# Altium PCB E1706D_Demo_2.PcbDoc
Units mil, origin at the board's own origin, x right, y up, seen from the top; angles counter-clockwise.
Board outline 3710 x 4675 mil, 2 copper layers (Top Layer, Bottom Layer); 45 components, 39 nets, 148 pads, 21 vias.
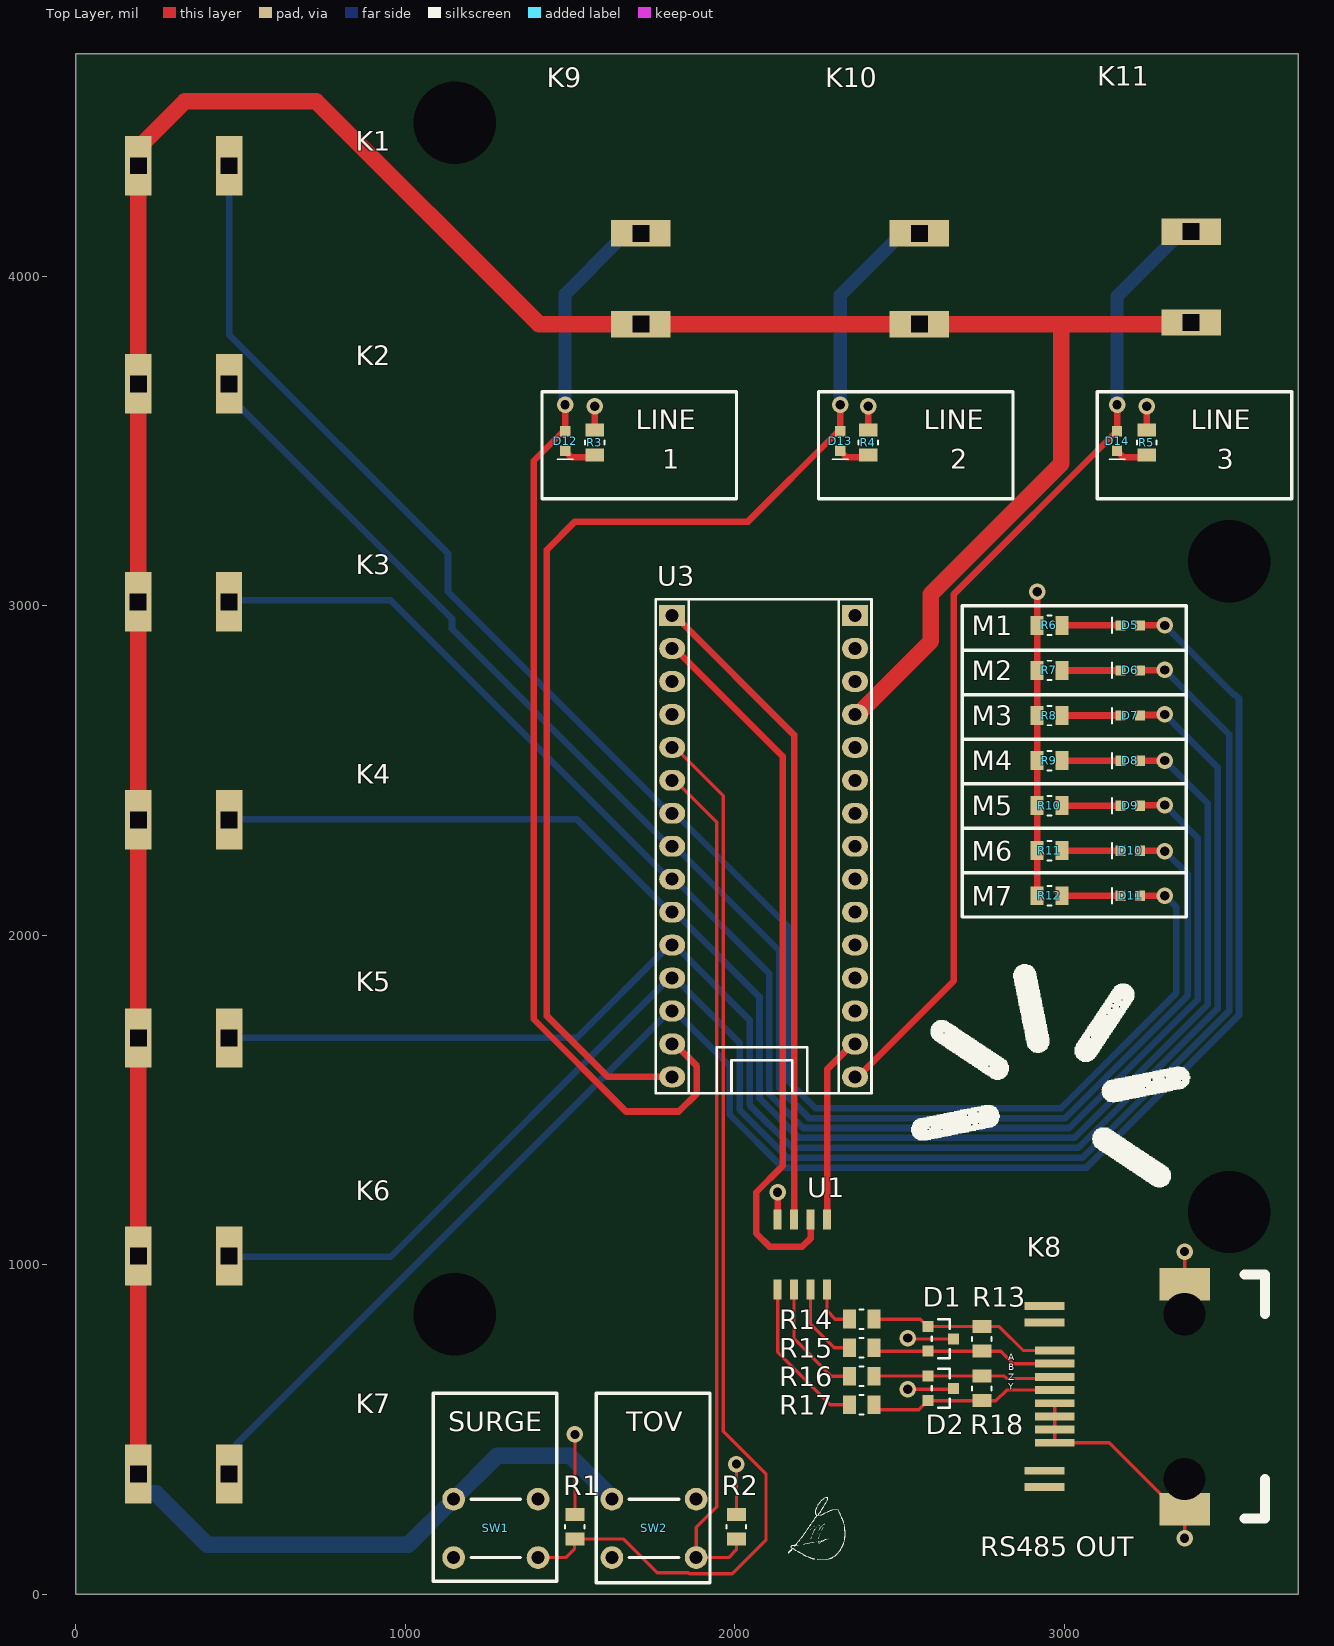
[diagram p0: Top Layer view]
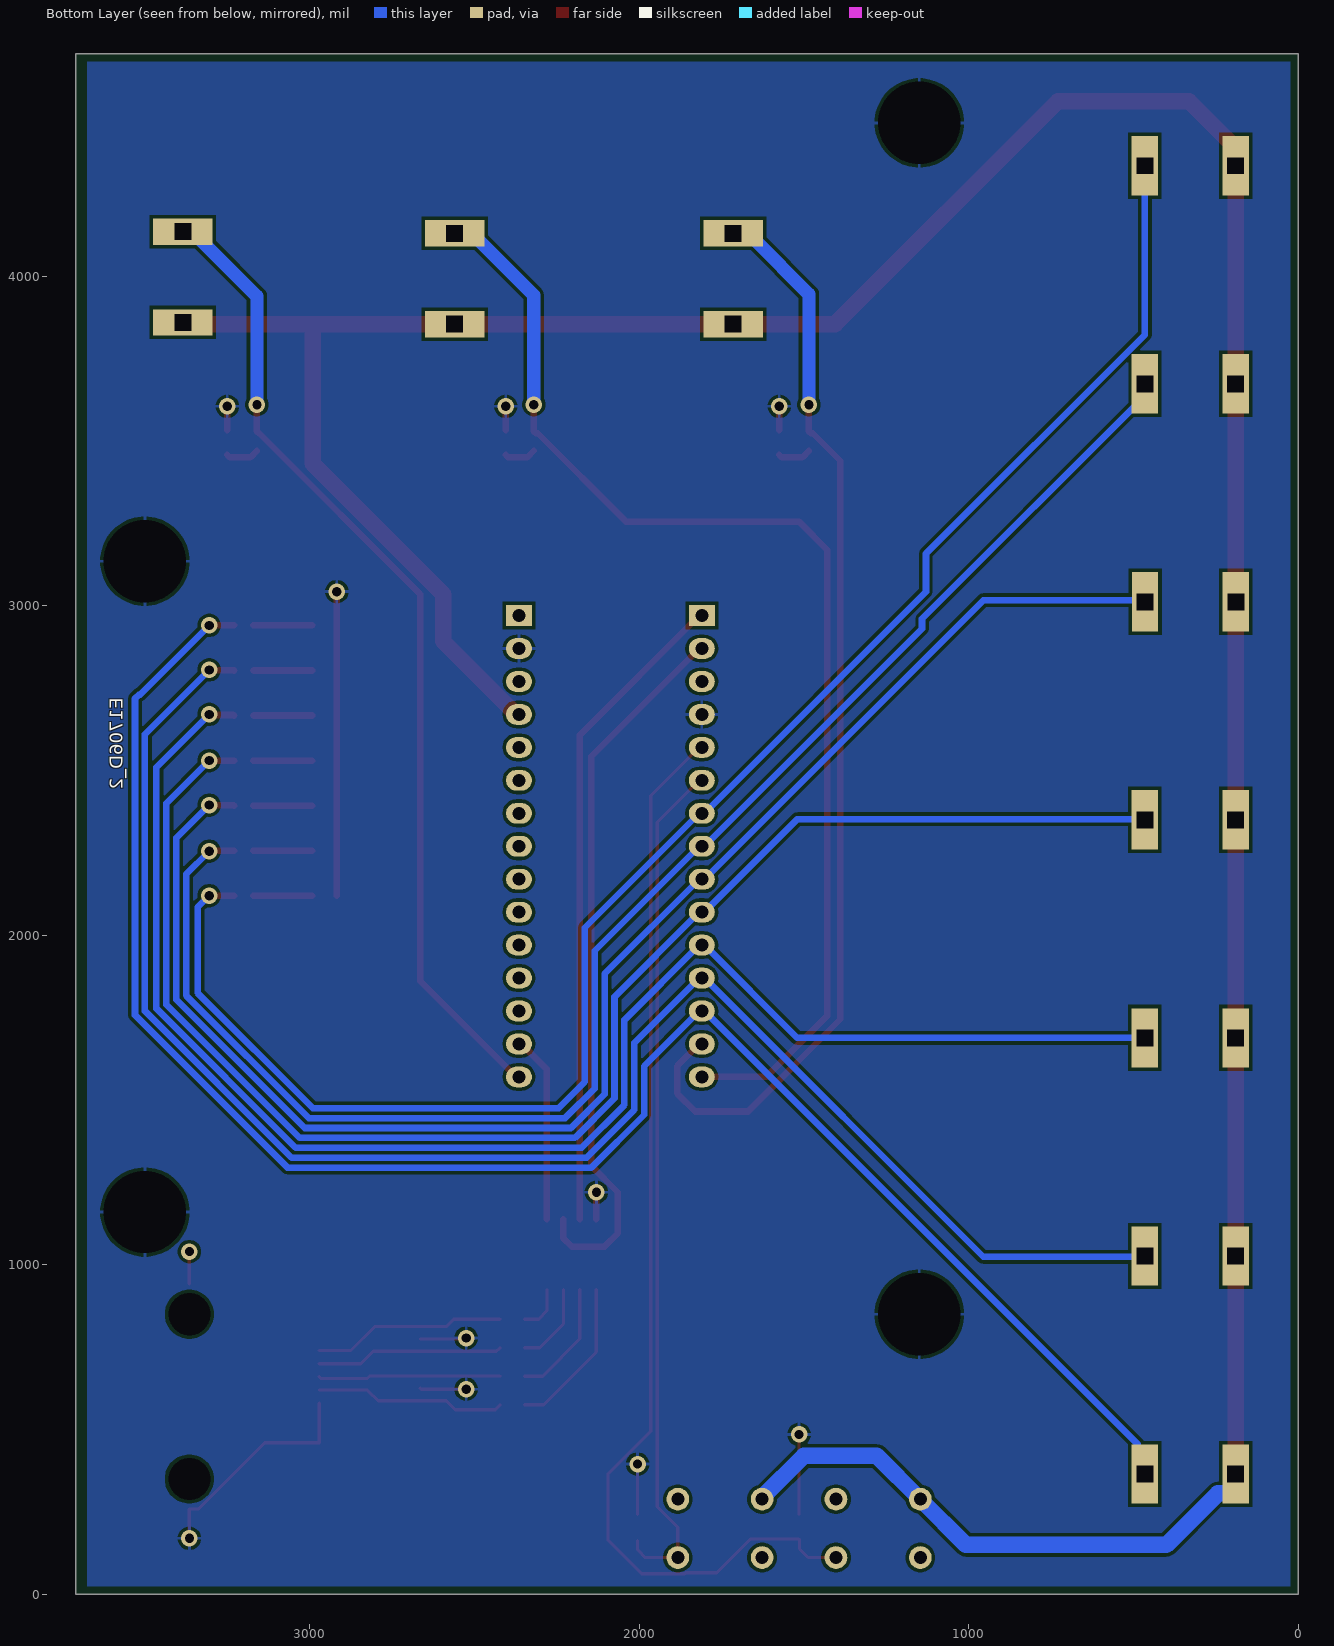
[diagram p1: Bottom Layer view, seen from below]
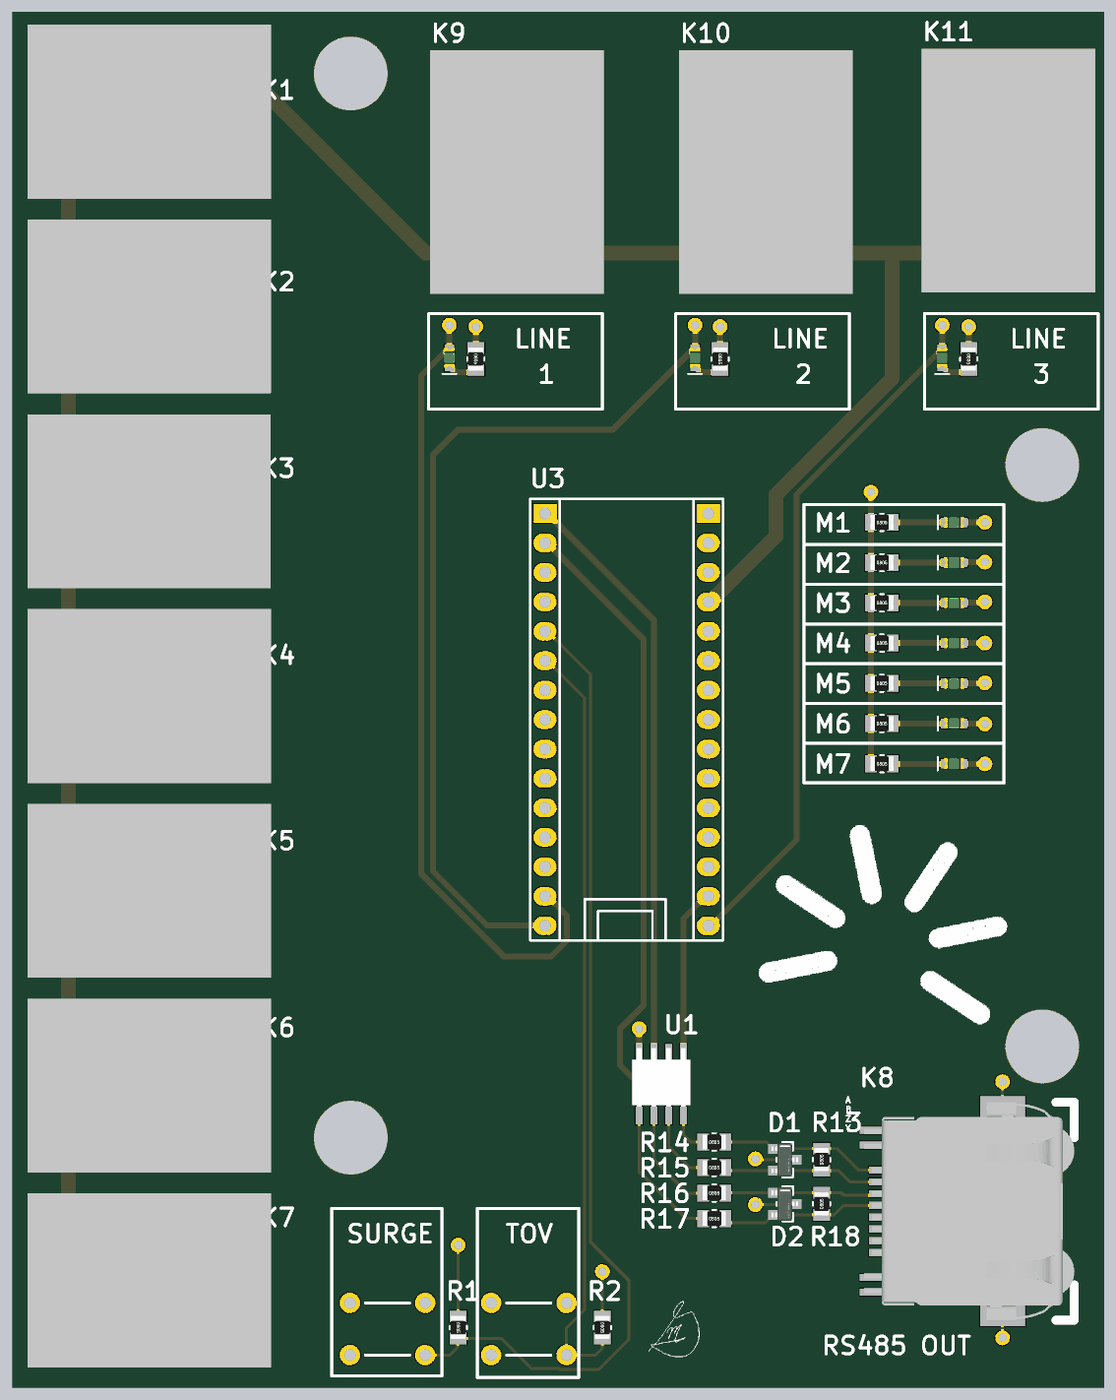
[diagram p2: 3D render of the assembled board from above, using the file's embedded part models]

## Layer stack, top to bottom
Top Solder: solder mask 0.4, Solder Resist, Dk 3.5
Top Layer: signal copper 1.4
Dielectric 1: dielectric 12.6, FR-4, Dk 4.8
Bottom Layer: signal copper 1.4
Bottom Solder: solder mask 0.4, Solder Resist, Dk 3.5

## Board outline
0,0 3710,0 3710,4675 0,4675

## Design rules (kind name [scope] priority, off if disabled: settings)
Clearance [All] p1: gap=10 ignorepadtopadclearanceinfootprint=FALSE except(0: Arc-Hole Track-Hole SMDPad-Hole THPad-Hole Via-Hole Fill-Hole Poly-Hole Region-Hole Text-Hole)
PolygonConnect [All] p1: connectstyle=Relief reliefconductorwidth=10 reliefentries=4 polygonreliefangle="90 Angle" airgapwidth=10
RoomDefinition E1706R_Schematic_1 [InComponentClass('E1706R_Schematic_1')] p1: confinementstyle=ConfineIn formatcopy=TRUE lockcomponents=FALSE outline 3755,1055 6760,1055 6760,3165 3755,3165
RoomDefinition E1706D_Schematic [InComponentClass('E1706D_Schematic')] p2: confinementstyle=ConfineIn formatcopy=TRUE lockcomponents=FALSE outline 6910,910 21770,910 21770,2610 6910,2610
RoutingVias [All] p1: holewidth=28 width=50 viastyle="Through Hole" minholewidth=28 minwidth=50 maxholewidth=28 maxwidth=50
SolderMaskExpansion [All] p1: expansion=4 istentingtop=FALSE
Width [All] p1: maxlimit=100 minlimit=10 preferedwidth=10
30 further rules are at their usual default settings.

## Components (designator, comment, footprint, x,y, rotation, side; value= is the part's Value field where it differs from the comment)
D1 "CDSOT23-SM712" FP-SOT23-MFG 2625,775 r0 top value=75pF
D2 "CDSOT23-SM712" FP-SOT23-MFG 2625,625 r0 top value=75pF
D5 "LED_RED_0603" LED_LTST-C190KRKT 3200,2940 r0 top
D6 "LED_RED_0603" LED_LTST-C190KRKT 3200,2803.33 r0 top
D7 "LED_RED_0603" LED_LTST-C190KRKT 3200,2666.67 r0 top
D8 "LED_RED_0603" LED_LTST-C190KRKT 3200,2530 r0 top
D9 "LED_RED_0603" LED_LTST-C190KRKT 3200,2393.33 r0 top
D10 "LED_RED_0603" LED_LTST-C190KRKT 3200,2256.67 r0 top
D11 "LED_RED_0603" LED_LTST-C190KRKT 3200,2120 r0 top
D12 "LED_RED_0603" LED_LTST-C190KRKT 1485,3499.4 r90 top
D13 "LED_RED_0603" LED_LTST-C190KRKT 2320,3499.4 r90 top
D14 "LED_RED_0603" LED_LTST-C190KRKT 3160,3499.4 r90 top
K1 "RA11131100" RA11131100 190,4335 r0 top
K2 "RA11131100" RA11131100 190,3673.33 r0 top
K3 "RA11131100" RA11131100 189.41,3011.67 r0 top
K4 "RA11131100" RA11131100 190,2350 r0 top
K5 "RA11131100" RA11131100 190,1688.33 r0 top
K6 "RA11131100" RA11131100 190,1026.67 r0 top
K7 "RA11131100" RA11131100 190,365 r0 top
K8 "6339191-5" 6339191-5 2971.3,459.84 r90 top
K9 "RA11131100" RA11131100 1715,3854.41 r90 top
K10 "RA11131100" RA11131100 2560,3854.41 r90 top
K11 "RA11131100" RA11131100 3385,3859.41 r90 top
R1 "10K" RESC2012N 1515,205 r270 top
R2 "10K" RESC2012N 2005,205 r270 top
R3 "150" RESC2012N 1575,3495 r270 top
R4 "150" RESC2012N 2405,3495 r270 top
R5 "150" RESC2012N 3250,3495 r270 top
R6 "150" RESC2012N 2955,2940 r0 top
R7 "150" RESC2012N 2955,2803.33 r0 top
R8 "150" RESC2012N 2955,2666.67 r0 top
R9 "150" RESC2012N 2955,2530 r0 top
R10 "150" RESC2012N 2955,2393.33 r0 top
R11 "150" RESC2012N 2955,2256.67 r0 top
R12 "150" RESC2012N 2955,2120 r0 top
R13 "Res_120_0805" RESC2012N 2750,775 r90 top
R14 "Res_10_0805" RESC2012N 2385,835 r0 top
R15 "Res_10_0805" RESC2012N 2385,748.33 r0 top
R16 "Res_10_0805" RESC2012N 2385,661.67 r0 top
R17 "Res_10_0805" RESC2012N 2385,575 r0 top
R18 "Res_120_0805" RESC2012N 2750,625 r90 top
SW1 "PTS645SL50-2 LFS" "PTS645SL50-2 LFS" 1275,200 r0 top
SW2 "PTS645SL50-2 LFS" "PTS645SL50-2 LFS" 1755,200 r0 top
U1 "SN65HVD71DR" SN65HVD71DR 2280,1137.6 r180 top
U3 "Arduino Nano" "Arduino Nano" 2080,2230 r90 top

## Footprints (in the part's own frame and the unit in brackets; to place one, negate y for a bottom-side part, rotate by r counter-clockwise, add the part's x,y. Pads: shape width x height; smd on the part's side, far side on the other; paste and mask are expansions set on the pad)
6339191-5 [mm]
  rect 2.5x3.9 smd: 0(-5.11,-10) 0(12.23,-10)
  rect 0.61x3.05 smd: 0(-3.425,0.8) 0(-2.155,0.8) 0(9.275,0.8) 0(10.545,0.8) 1(0,0) 2(1.016,0) 3(2.032,0) 4(3.048,0) 5(4.064,0) 6(5.08,0) 7(6.096,0) 8(7.112,0)
  round 1.524 hole 3.25: 0(-2.79,-10) 0(9.91,-10)
  silkscreen extent -5.84,-16.2 12.96,-14.6, body extent -5.84,-16.2 12.96,1.97, height 14.92
"Arduino Nano" [mm]
  rect 1.6x2 hole 1: 1(18.796,6.858) 30(18.796,-7.239)
  oval 1.6x2 hole 1: 2(16.256,6.858) 3(13.716,6.858) 4(11.176,6.858) 5(8.636,6.858) 6(6.096,6.858) 7(3.556,6.858) 8(1.016,6.858) 9(-1.524,6.858) 10(-4.064,6.858) 11(-6.604,6.858) 12(-9.144,6.858) 13(-11.684,6.858) 14(-14.224,6.858) 15(-16.764,6.858) 16(-16.764,-7.239) 17(-14.224,-7.239) 18(-11.684,-7.239) 19(-9.144,-7.239) 20(-6.604,-7.239) 21(-4.064,-7.239) 22(-1.524,-7.239) 23(1.016,-7.239) 24(3.556,-7.239) 25(6.096,-7.239) 26(8.636,-7.239) 27(11.176,-7.239) 28(13.716,-7.239) 29(16.256,-7.239)
  silkscreen extent -18.03,-8.51 20.07,8.13
FP-SOT23-MFG [mm]
  rect 0.85x0.85 smd paste+0 mask+0: 1(-1,0.95) 2(-1,-0.95) 3(1,0)
  silkscreen extent -0.7,-1.5 0.7,1.5, body extent -1.53,-1.6 1.53,1.6, height 0.25
LED_LTST-C190KRKT [mm] "Chip LED, Red, Body 1.6x0.8mm, IPC Medium Density"
  rect 0.8x0.8 smd: 1(-0.75,0) 2(0.75,0)
  silkscreen extent -1.4,-0.6 -1.4,0.6, body extent -0.85,-0.45 0.85,0.45, height 0.9
"PTS645SL50-2 LFS" [mm]
  round 1.75 hole 1: 1(-3.25,2.25) 2(3.25,2.25) 3(-3.25,-2.25) 4(3.25,-2.25)
  silkscreen extent -1.91,-2.25 1.91,2.25, body extent -3.25,-2.92 3.25,2.92, height 3.45
RA11131100 [mil] "Rocker Switch"
  rect 80x180 hole 50 square: 1(0,0) 2(275.59,0)
  body extent -138,-295 689,295, height 484
RESC2012N [mm] "Chip Resistor, Body 2.0x1.3mm, IPC Med Density"
  rect 1x1.45 smd: 1(-0.95,0) 2(0.95,0)
  silkscreen extent -0.15,-0.75 0.15,0.75, body extent -1,-0.63 1,0.63, height 0.59
SN65HVD71DR [mm] "SOIC-8"
  rect 0.6x1.55 smd: 1(0,0) 2(1.27,0) 3(2.54,0) 4(3.81,0) 5(3.81,5.4) 6(2.54,5.4) 7(1.27,5.4) 8(0,5.4)
  body extent -0.6,-0.41 4.4,5.59, height 1.75

## Part data
D1 D2: library part CMP-2000-05081-2, "TVS DIODE 7V/12V 14V/26V SOT23-3", Breakdown Voltage=7.5V, Capacitance=75pF, Case/Package=SOT-23, Clamping Voltage=26V, Leakage Current=20uA, Manufacturer="Bourns Inc.", Max Breakdown Voltage=13.3V, Max Operating Temperature=150°C, Max Power Dissipation=600W, Max Surge Current=30A, Min Operating Temperature=-55°C, Package=SOT23, Package Quantity=1, Peak Pulse Current=17A, Peak Pulse Power=400W, Power Line Protection=No, Resistor Type=Zener, Reverse Standoff Voltage=12V, Supplier Part Number 1=CDSOT23-SM712CT-ND, Temperature="-55°C to +150°C", Temperature Range High=+150°C, Test Current=1mA, Automotive=No, Category=Diode, ComponentLink1Description=https://datasheet.ciiva.com/1281/1670933-1281331.pdf?src-supplier=Farnell, ComponentLink1URL=https://datasheet.ciiva.com/1281/1670933-1281331.pdf?src-supplier=Farnell, ComponentLink2Description=Datasheet, ComponentLink2URL=https://www.bourns.com/docs/Product-Datasheets/CDSOT23-SM712.pdf, ComponentLink3Description=https://datasheet.ciiva.com/4510/cdsot23-sm712-25932-4510261.pdf?src-supplier=Mouser, ComponentLink3URL=https://datasheet.ciiva.com/4510/cdsot23-sm712-25932-4510261.pdf?src-supplier=Mouser, ComponentLink4Description=https://datasheet.ciiva.com/11193/cdsot23-sm712-11193846.pdf?src-supplier=Avnet, ComponentLink4URL=https://datasheet.ciiva.com/11193/cdsot23-sm712-11193846.pdf?src-supplier=Avnet, ComponentLink5Description=https://datasheet.ciiva.com/16582/cdsot23-sm712-16582189.pdf?src-supplier=Avnet+Europe, ComponentLink5URL=https://datasheet.ciiva.com/16582/cdsot23-sm712-16582189.pdf?src-supplier=Avnet+Europe, ComponentLink6Description=https://datasheet.ciiva.com/337/cdsot23-sm712-337451.pdf?src-supplier=Digi-Key, ComponentLink6URL=https://datasheet.ciiva.com/337/cdsot23-sm712-337451.pdf?src-supplier=Digi-Key, ComponentLink7Description=https://datasheet.ciiva.com/337/cdsot23-sm712-337452.pdf?src-supplier=Digi-Key, ComponentLink7URL=https://datasheet.ciiva.com/337/cdsot23-sm712-337452.pdf?src-supplier=Digi-Key, ComponentLink8Description=https://datasheet.ciiva.com/26828/getdatasheetpartid-418501-26828522.pdf?src-supplier=Verical, ComponentLink8URL=https://datasheet.ciiva.com/26828/getdatasheetpartid-418501-26828522.pdf?src-supplier=Verical, ComponentLink9Description=https://datasheet.ciiva.com/22696/1670933-22696779.pdf?src-supplier=Element14, ComponentLink9URL=https://datasheet.ciiva.com/22696/1670933-22696779.pdf?src-supplier=Element14, Contact Plating=Tin, Depth=1.4mm, Device Class L1="Circuit Protection", Device Class L2="TVS Diodes", Device Class L3=unset, Digikey Description="TVS DIODE 7V/12V 14V/26V SOT23-3", Diode Type=ZENER, Direction=Bidirectional, Element Configuration=Dual, ESD Protection=Yes, Height=1.17mm, Ipc Land Pattern Name=SOT95P229X103-3, Lead Free=Yes, Length=3.04mm, Manufacturer Part Number=CDSOT23-SM712, Max Reverse Leakage Current=20uA, Min Breakdown Voltage=13.3V, Mount="Surface Mount", Mouser Description="Transient Voltage Suppressor, TVS, CDSOT23 Series, Unidirectional, 12 V, SOT-23, 3, 13.3 V", Number of Bidirectional Channels=2, Number of Channels=2, Number of Elements=2, Number of Pins=3, Octopart=https://octopart.com/cdsot23-sm712-bourns-7576327, Packaging="Tape and Reel", Polarity=Bidirectional,Unidirectional, Power Dissipation=400W, Pricing 1="1=1.63000, 10=1.46000, 100=1.13850, 500=0.94050, 1000=0.74250 (USD)", Radiation Hardening=No, REACH SVHC="No SVHC", Reverse Breakdown Voltage=13.3V, RoHS=TRUE, RoHS Compliant=Yes, Series=-, Standoff Height=0.05mm, Stock 1=37537, Supplier 1=Digi-Key, Temperature Range Low=-55°C, Termination=SMD/SMT, Width=0.055inch, Working Voltage=12V
D5 D6 D7 D8 D9 D10 D11 D12 D13 D14: library part LED_RED_LTST-C190, "LED RED 0603 SMD", Case Code (Imperial)=0603, Case Code (Metric)=1608, Forward Current=30mA, Forward Voltage=2.4V, Illumination Color=Red, Lens Color=Clear,Colorless, Manufacturer="Vishay Lite-On", Manufacturer P/N=LTST-C190KRKT, Max Operating Temperature=85°C, Min Operating Temperature=-55°C, Package Quantity=1, Power Dissipation=75mW, Reverse Voltage=5V, Supplier Part Number 1=160-1436-1-ND, Test Current=20mA, Case/Package=0603, ComponentLink3Description=http://optoelectronics.liteon.com/upload/download/DS-22-99-0151/LTST-C190KRKT.pdf, ComponentLink3URL=http://optoelectronics.liteon.com/upload/download/DS-22-99-0151/LTST-C190KRKT.pdf, Depth=0.8mm, Dominant Wavelength=631nm, Height=0.8mm, Lead Free="Lead Free", Length=1.6mm, Lens Style=Clear,Colorless,Diffused,Rectangular, Lens Transparency=Clear, Luminous Intensity=54mcd, Mount="Surface Mount", Number of Elements=1, Number of LEDs=1, Number of Pins=2, Power Rating=75mW, Radiation Hardening=No, Supplier 1=Digi-Key, Viewing Angle=130°, Wavelength=639nm, Width=0.8mm
R1 R2: library part Res_10K_0805, "RES 10K OHM 1/8W 1% 0805", Case Code (Imperial)=0805, Case Code (Metric)=2012, Manufacturer=Vishay, Manufacturer P/N=CRCW080510K0FKEA, Max Operating Temperature=155°C, Min Operating Temperature=-55°C, Package Quantity=5000, Power Rating=125mW, Resistance=10kR, Supplier Part Number 1=541-10.0KCCT-ND, Temperature Coefficient=100ppm/°C, Tolerance=1%, Voltage Rating=150V, Case/Package=0805, ComponentLink4Description=http://www.vishay.com/docs/20035/dcrcwe3.pdf, ComponentLink4URL=http://www.vishay.com/docs/20035/dcrcwe3.pdf, Composition="Thick Film", Contact Plating=Tin, Depth=1.25mm, Height=0.45mm, Lead Free="Lead Free", Length=2mm, Military Standard=Not, Radiation Hardening=No, REACH SVHC=Unknown, Supplier 1=Digi-Key, Termination=SMD/SMT, Voltage Rating (DC)=150V, Weight=0.000194oz, Width=1.25mm
R3 R4 R5 R6 R7 R8 R9 R10 R11 R12: library part Res_150_0805, "RES 150 OHM 1/8W 1% 0805", Case Code (Imperial)=0805, Case Code (Metric)=2012, Manufacturer=Vishay, Manufacturer P/N=CRCW0805150RFKEA, Max Operating Temperature=155°C, Max Power Dissipation=125mW, Min Operating Temperature=-55°C, Package Quantity=10, Resistance=150R, Supplier Part Number 1=541-150CCT-ND, Temperature Coefficient=100ppm/°C, Tolerance=1%, Voltage Rating=150V, Case/Package=0805, ComponentLink3Description=http://www.vishay.com/docs/20035/dcrcwe3.pdf, ComponentLink3URL=http://www.vishay.com/docs/20035/dcrcwe3.pdf, Composition="Thick Film", Contact Plating=Tin, Depth=1.25mm, Features="Automotive AEC-Q200", Height=0.45mm, Lead Free="Lead Free", Length=2mm, Military Standard=Not, Mount="Surface Mount", Power Rating=125mW, Radiation Hardening=No, REACH SVHC=Unknown, Supplier 1=Digi-Key, Termination=SMD/SMT, Voltage Rating (DC)=150V, Weight=0.000194oz, Width=0.049inch
R13 R18: "RES 120 OHM 1/8W 1% 0805"
R14 R15 R16 R17: "RES 10 OHM 1/8W 1% 0805", Manufacturer="Vishay Dale", Manufacturer P/N=CRCW080510R0FKEA, Package / Case="0805 (2012 Metric)", Power (Watts)="0.125W, 1/8W", Resistance (Ohms)=10, Supplier Part Number 1=541-10.0CCT-ND, Temperature Coefficient=±100ppm/°C, Tolerance=±1%, ComponentLink1Description=Datasheet, ComponentLink1URL=http://www.vishay.com/doc?20035, Composition="Thick Film", Features="Automotive AEC-Q200 Qualified", RoHS="RoHS Compliant", Supplier 1=Digi-Key, Supplier 2=Digi-Key, Supplier Part Number 2=541-10.0CTR-ND
U1: "Single Transmitter/Receiver RS-485 8-Pin SOIC T/R", Case/Package=SOIC, Manufacturer="Texas Instruments", Max Operating Temperature=125°C, Min Operating Temperature=-40°C, Operating Supply Voltage=3.3V, Supplier Part Number 1=296-40519-1-ND, Category="RS-232 / RS-422 / RS-485 Interface ICs", ComponentLink1Description=https://datasheet.ciiva.com/48475/sn65hvd70-48475464.pdf?src-supplier=Avnet, ComponentLink1URL=https://datasheet.ciiva.com/48475/sn65hvd70-48475464.pdf?src-supplier=Avnet, Data Rate=400Kbps, Lead Free="Lead Free", Logic Function=Receiver, Manufacturer Part Number=SN65HVD71DR, Mount="Surface Mount", Number of Pins=8, Number of Transmitters=1, Packaging="Tape and Reel", Pricing 1="1=3.41000, 10=3.06300, 25=2.89520, 100=2.50930, 250=2.38064, 500=2.13616, 1000=2.12450 (USD)", Receiver Hysteresis=70mV, RoHS=Yes, RoHS Compliant=Yes, Simplex/Duplex="Full Duplex", Stock 1=1611, Supplier 1=Digi-Key
U3: library part DFR0100, Supplier Part Number 1=1738-1026-ND, Supplier 1=Digi-Key

## Free pads (board coordinates)
  round 60 hole 250: 2(1150,850) 2(1150,4465) 2(3500,1160) 2(3500,3135)

## Via types
v1: diameter 50, hole 28, Top Layer to Bottom Layer, 21 vias

## Nets (pads, with @x,y where several pads share a name; then routed paths per layer and width w, separated by ;. In a path a pad name is that pad's centre, name@x,y a point inside that pad or via, vN(x,y) a via of type N, cw(c..) or ccw(c..) an arc to the next point about the centre after c; other vN are vias at no path point)
3v3: U1.1 U3.17 | length 572.2
  Top Layer w20: U1.1 2280,1592.87 2357.13,1670 U3.17
5V: K1.1 K2.1 K3.1 K4.1 K5.1 K6.1 K7.1 K9.1 K10.1 K11.1 SW1.1 SW2.1 U3.27 | length 10739.6
  Top Layer w50: K7.1@189.98,360 189.98,1024.17 K5.1 189.98,2352.5 189.98,3016.67 189.98,3680.83 189.98,4345 189.98,4389.29 330.69,4530 730,4530 1405.59,3854.41 1710,3854.41 2552.5,3854.41 2990,3854.41 ; U3.27 2372.87,2670 2595,2892.13 2595,3035 2990,3430 2990,3854.41 ; K11.1@3395,3854.41 2990,3854.41
  Bottom Layer w50: K7.1@189.98,360 189.98,315.71 199.43,306.26 243.72,306.26 399.98,150 1008.46,150 SW1.1 1278.46,420 1500.74,420 1627.05,293.7 SW2.1
A: D1.1 K8.8 R13.2 R14.2 | length 588.3
  Top Layer w10: R14.2 2563.03,835 D1.1 R13.2 2802.6,812.4 2875.16,739.84 K8.8
B: D1.2 K8.7 R13.1 R15.2 | length 569
  Top Layer w10: R15.2 2433.14,737.6 D1.2 R13.1 2807.6,737.6 2845.35,699.84 K8.7
D2: R1.2 SW1.4 U3.5 | length 3345.6
  Top Layer w10: SW1.4 1486.42,111.42 1513.77,138.77 1513.77,166.37 R1.2 1662.4,167.6 1765,65 1859.44,65 1862.47,61.97 1991.97,61.97 2095,165 2095,365 1965,495 1965,2422.87 1817.87,2570 U3.5
D3: R2.2 SW2.4 U3.6 | length 2604.2
  Top Layer w10: U3.6 1817.87,2470 1945,2342.87 1945,265 1882.95,202.95 SW2.4 1981.42,111.42 2005,135 R2.2@2005,162.6
D4: D11.2 K1.2 U3.7 | length 5241.2
  Top Layer w20: D11.2 v1(3305,2120)
  Bottom Layer w20: K1.2@465.57,4345 465.57,3822.31 1129.74,3158.14 1129.74,3042.39 1802.13,2370 U3.7 1817.87,2370 2165,2022.87 2165,1555 2245,1475 2990,1475 3340,1825 3340,2085 v1(3305,2120)
D5: D10.2 K2.2 U3.8 | length 4820.8
  Top Layer w20: D10.2 3230.36,2255.83 3304.17,2255.83 v1(3305,2255)
  Bottom Layer w20: K2.2@465.57,3680.83 465.57,3636.54 1141.96,2960.15 1141.96,2930.16 1802.13,2270 U3.8 1817.87,2270 2135,1952.87 2135,1535 2225,1445 3002.57,1445 3375,1817.43 3375,2185 v1(3305,2255)
D6: D9.2 K3.2 U3.9 | length 4686.1
  Top Layer w20: D9.2 3230.36,2394.17 3304.17,2394.17 v1(3305,2395)
  Bottom Layer w20: K3.2@465.57,3016.67 955.46,3016.67 1802.13,2170 U3.9 1817.87,2170 2105,1882.87 2105,1517.43 2207.43,1415 3015,1415 3405,1805 3405,2295 v1(3305,2395)
D7: D8.2 K4.2 U3.10 | length 4587.7
  Top Layer w20: D8.2 v1(3305,2530)
  Bottom Layer w20: K4.2@465.57,2352.5 1519.63,2352.5 1802.13,2070 U3.10 1817.87,2070 2075,1812.87 2075,1505 2195,1385 3030.15,1385 3435,1789.85 3435,2400 v1(3305,2530)
D8: D7.2 K5.2 U3.11 | length 4732.6
  Top Layer w20: D7.2 3231.19,2668.33 3303.33,2668.33 v1(3305,2670)
  Bottom Layer w20: K5.2 1520.46,1688.33 1802.13,1970 U3.11 1817.87,1970 2045,1742.87 2045,1485 2175,1355 3042.57,1355 3465,1777.43 3465,2510 v1(3305,2670)
D9: D6.2 K6.2 U3.12 | length 5105.6
  Top Layer w20: D6.2 3230.36,2804.17 3304.17,2804.17 v1(3305,2805)
  Bottom Layer w20: K6.2@465.57,1024.17 956.29,1024.17 1802.13,1870 U3.12 1817.87,1870 2015,1672.87 2015,1470 2160,1325 3055,1325 3500,1770 3500,2610 v1(3305,2805)
D10: D5.2 K7.2 U3.13 | length 5519.5
  Top Layer w20: D5.2 v1(3305,2940)
  Bottom Layer w20: K7.2@465.57,360 486.66,381.08 486.66,454.53 1802.13,1770 U3.13 1817.87,1770 1985,1602.87 1985,1455 2145,1295 3067.43,1295 3530,1757.57 3530,2718.28 3518.28,2730 3515,2730 v1(3305,2940)
D11: D12.2 K9.2 U3.14 | length 3442.2
  Top Layer w20: D12.2@1485,3534.67 D12.2 ; D12.2@1485,3535 v1(1485,3610) ; v1@1485,3605 D12.2 ; U3.14 1817.87,1670 1885,1602.87 1885,1520 1830,1465 1670,1465 1390,1745 1390,3440 1473.18,3523.18 1479.25,3523.18 D12.2
  Bottom Layer w40: v1(1485,3610) 1485,3945.55 1651.26,4111.81 1651.26,4115.55 1665.71,4130 K9.2@1710,4130
D12: D13.2 K10.2 U3.15 | length 3639.4
  Top Layer w20: U3.15 1615,1570 1430,1755 1430,3170 1515,3255 2040,3255 2308.18,3523.18 2314.25,3523.18 D13.2 ; D13.2@2320,3534.67 D13.2 ; v1(2320,3610) D13.2
  Bottom Layer w40: v1(2320,3610) 2320,3941.79 2508.21,4130 K10.2@2552.5,4130
D13: D14.2 K11.2 U3.16 | length 3017.8
  Top Layer w20: U3.16 2372.87,1570 2665,1862.13 2665,3035 3153.18,3523.18 3154.25,3523.18 D14.2 v1(3160,3610)
  Bottom Layer w40: v1(3160,3610) 3160,3939.29 3336.26,4115.55 3350.71,4130 K11.2@3395,4130
GND: D1.3 D2.3 K8.1 K8.2 K8.3 K8.4 pad.2 R1.1 R2.1 R3.1 R4.1 R5.1 R6.1 R7.1 R8.1 R9.1 R10.1 R11.1 R12.1 U1.4 U3.4 U3.29 | length 2573
  Top Layer w10: R1.1 v1@1515,470 ; R2.1 v1(2005,395) ; v1(2525,622.4) 2661.77,622.4 D2.3 ; v1(2525,777.6) 2527.6,775 D1.3 ; K8.4 K8.3 K8.2 K8.1 3136.26,459.84 3337.44,258.66 3365,258.66 v1(3365,170)
  Top Layer w20: R3.1 v1(1575,3605) ; U1.4 v1(2130,1220) ; R4.1 v1(2405,3605) ; R12.1 R11.1 R10.1 R9.1 R8.1 R7.1 R6.1 v1(2917.6,3042.6) v1@2920,3045 ; R5.1 v1(3250,3605)
  other v1: 1515,485
NetD5_1: D5.1 R6.2 | length 178.1
  Top Layer w20: R6.2 D5.1
NetD6_1: D6.1 R7.2 | length 178.1
  Top Layer w20: R7.2 D6.1
NetD7_1: D7.1 R8.2 | length 178.1
  Top Layer w20: R8.2 D7.1
NetD8_1: D8.1 R9.2 | length 178.1
  Top Layer w20: R9.2 D8.1
NetD9_1: D9.1 R10.2 | length 178.1
  Top Layer w20: R10.2 D9.1
NetD10_1: D10.1 R11.2 | length 178.1
  Top Layer w20: R11.2 D10.1
NetD11_1: D11.1 R12.2 | length 178.1
  Top Layer w20: R12.2 D11.1
NetD12_1: D12.1 R3.2 | length 101.4
  Top Layer w20: D12.1 1504.87,3450 1567.4,3450 R3.2
NetD13_1: D13.1 R4.2 | length 96.4
  Top Layer w20: D13.1 2339.87,3450 2397.4,3450 R4.2
NetD14_1: D14.1 R5.2 | length 101.4
  Top Layer w20: D14.1 3179.87,3450 3242.4,3450 R5.2
NetR14_1: R14.1 U1.8 | length 143
  Top Layer w10: U1.8 2280,860 2305,835 R14.1
NetR15_1: R15.1 U1.7 | length 252.3
  Top Layer w10: U1.7 2230,820 2301.67,748.33 R15.1
NetR16_1: R16.1 U1.6 | length 364.5
  Top Layer w10: U1.6 2180,775 2293.33,661.67 R16.1
NetR17_1: R17.1 U1.5 | length 473.9
  Top Layer w10: U1.5 2130,735 2290,575 R17.1
NetR20_1: 
NetR21_1: 
NetR22_1: 
NetR23_1: 
Rx: U1.2 U3.2 | length 2201
  Top Layer w20: U3.2 1817.87,2870 2145,2542.87 2145,1300 2065,1220 2065,1095 2105,1055 2205,1055 2230,1080 U1.2
Tx: U1.3 U3.1 | length 1990.3
  Top Layer w20: U3.1 1817.87,2970 2180,2607.87 U1.3
Y: D2.2 K8.5 R17.2 R18.1 | length 580.1
  Top Layer w10: R17.2 2422.4,574.69 2437.09,560 2558.03,560 D2.2 R18.1 2792.6,587.6 2824.84,619.84 K8.5
Z: D2.1 K8.6 R16.2 R18.2 | length 554.3
  Top Layer w10: R16.2 2423.14,662.4 D2.1 R18.2 2817.6,662.4 2825,655 2966.46,655 K8.6
pads on no net: K8.0 SW1.2 SW1.3 SW2.2 SW2.3 U3.3 U3.18 U3.19 U3.20 U3.21 U3.22 U3.23 U3.24 U3.25 U3.26 U3.28 U3.30
copper on no net: | length 98.7
  Top Layer w10: 3365,941.34 v1(3365,1040)

## Polygon pours and split planes (outlines as drawn)
GND on Bottom Layer "GND_L02_P000" (solid, pour order 0): 25,4650 3675,4650 3675,25 25,25

## Silkscreen, mask and mechanical layers (free items; w line width, h text height)
Top Overlay:
  drawing of 55 lines, arcs and shapes, not listed
  text "LINE" at 1700,3535 h60
  text "LINE" at 2573.43,3535 h60
  text "LINE" at 3383.02,3535 h60
  text "1" at 1780,3415 h60
  text "2" at 2653.43,3415 h60
  text "3" at 3463.02,3415 h60
  text "M1" at 2719.33,2910.01 h60
  text "M2" at 2719.33,2773.34 h60
  text "M3" at 2719.33,2636.68 h60
  text "M4" at 2719.33,2500.01 h60
  text "M5" at 2719.33,2363.34 h60
  text "M6" at 2719.33,2226.68 h60
  text "M7" at 2719.33,2090.01 h60
  text "A / B / Z / Y" at 2830,620 h20
  text "SURGE" at 1130,495 h60
  text "TOV" at 1670,495 h60
  text "RS485 OUT" at 2745,115 h60
Bottom Overlay:
  text "E1706D_2" at 3566.66,2720 h40 r270
Mechanical 1:
  the board outline again, w10